# Altium PCB openmv4_PCB.PcbDoc
Units mm, origin at the board's own origin, x right, y up, seen from the top; angles counter-clockwise.
Board outline 35.56 x 44.45 mm, 2 copper layers (Top Layer, Bottom Layer); 61 components, 81 nets, 309 pads, 192 vias.
Unrouted connection lines stored in the file: 39.
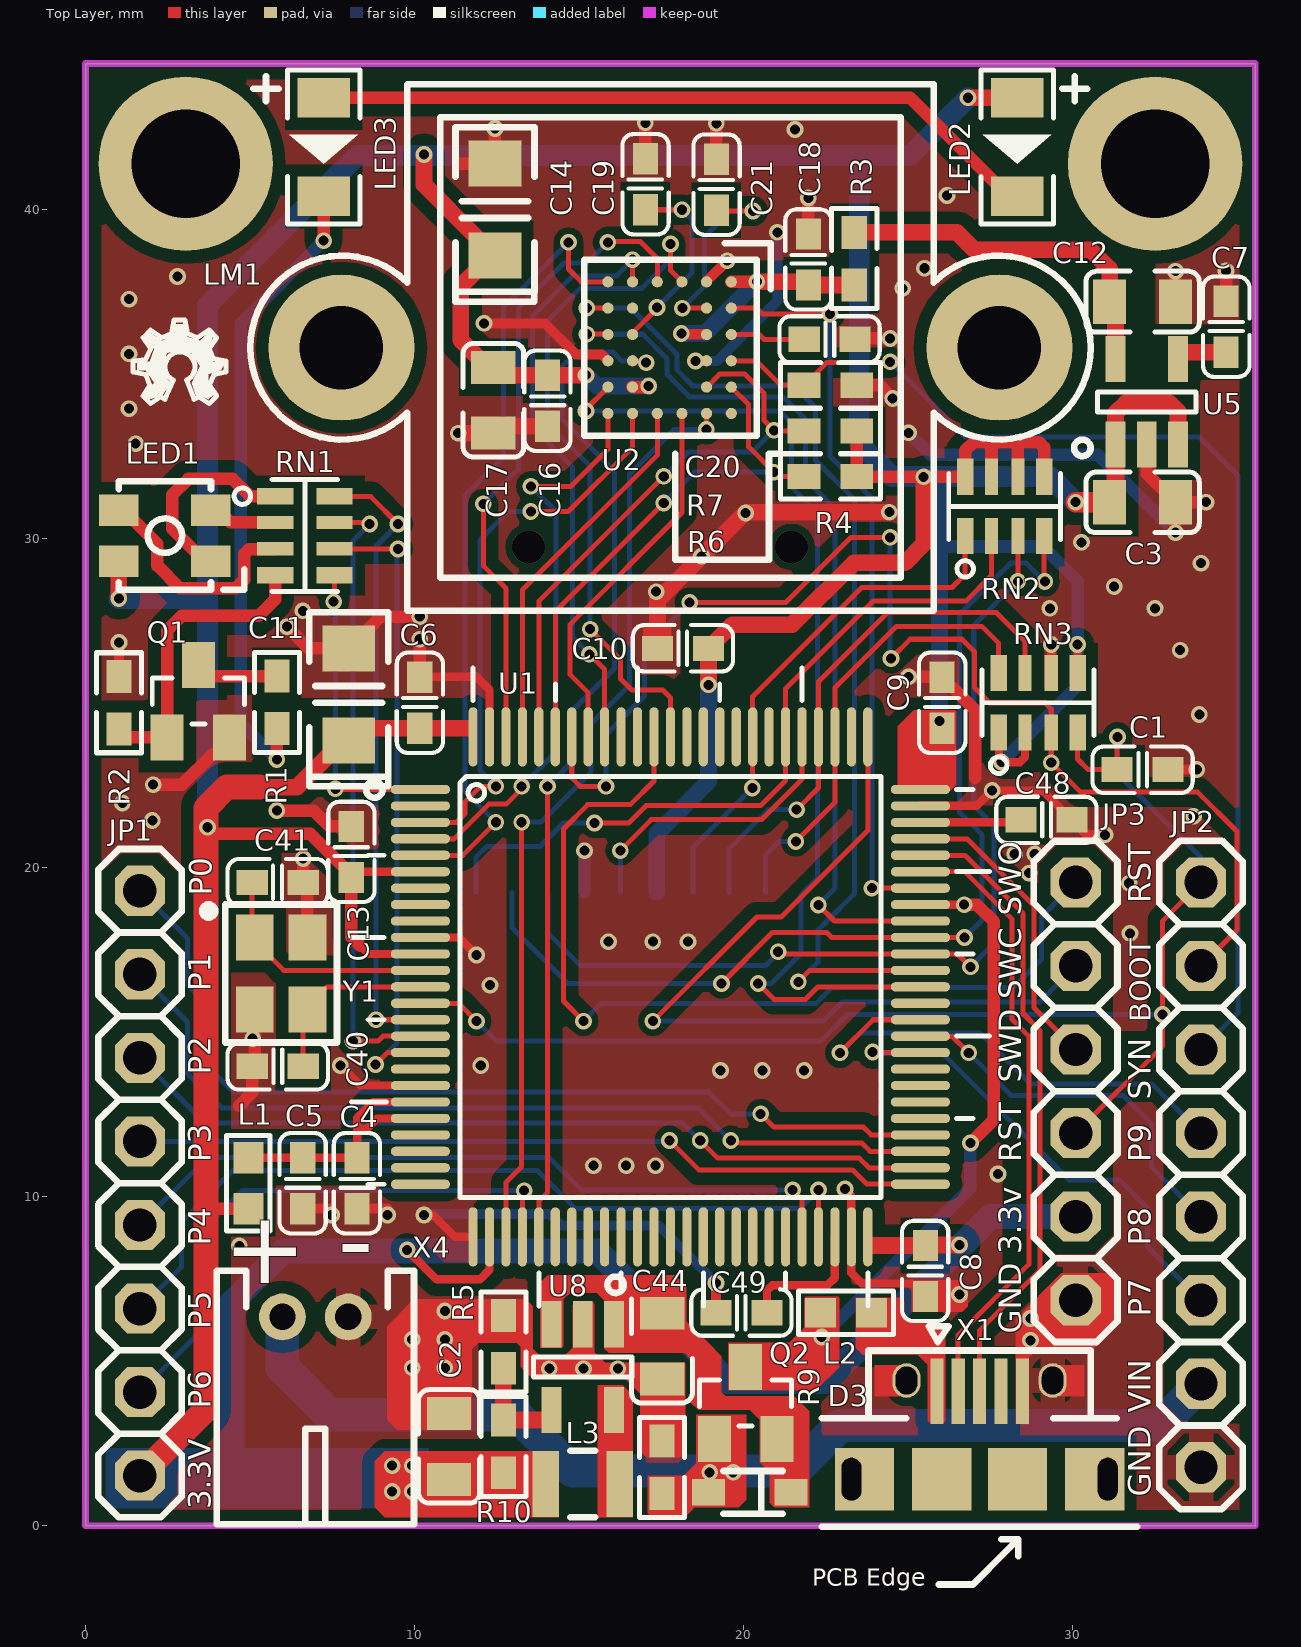
[diagram p0: Top Layer view]
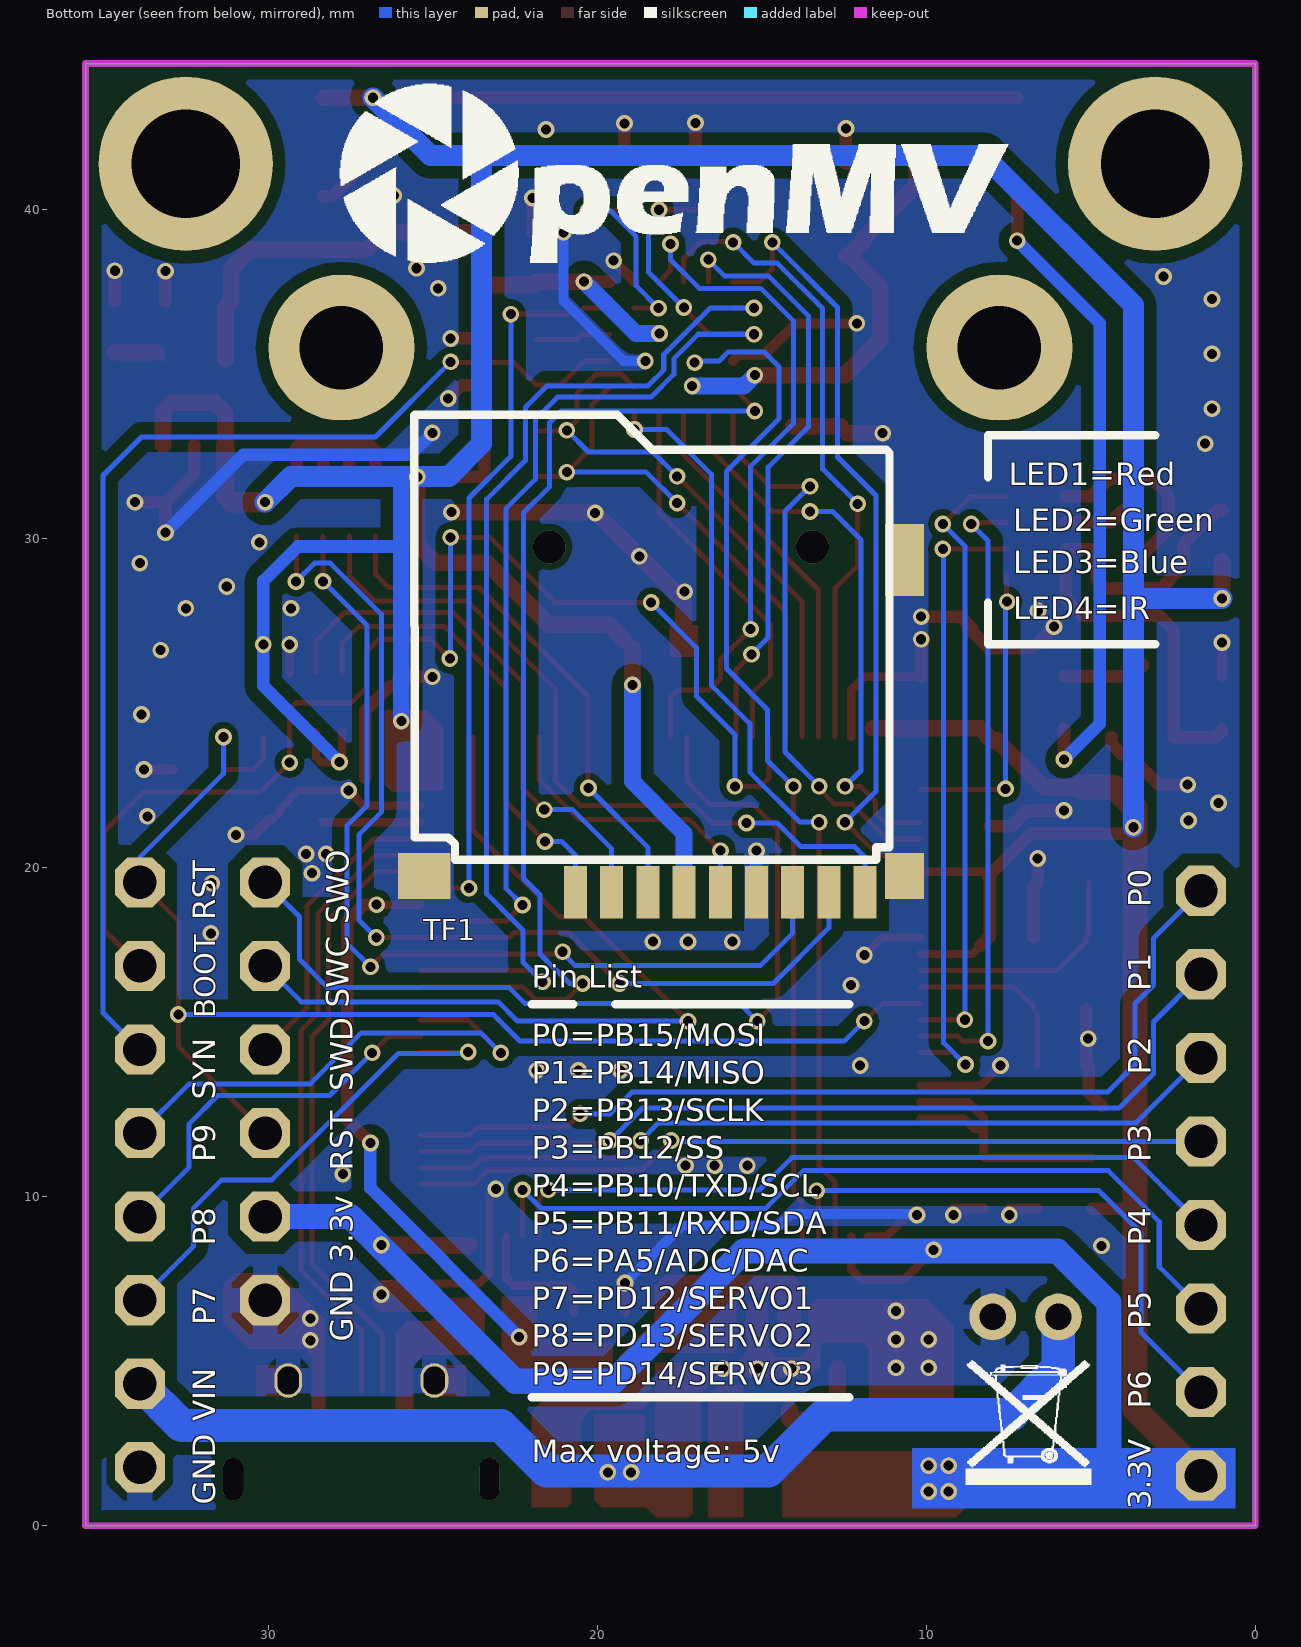
[diagram p1: Bottom Layer view, seen from below]
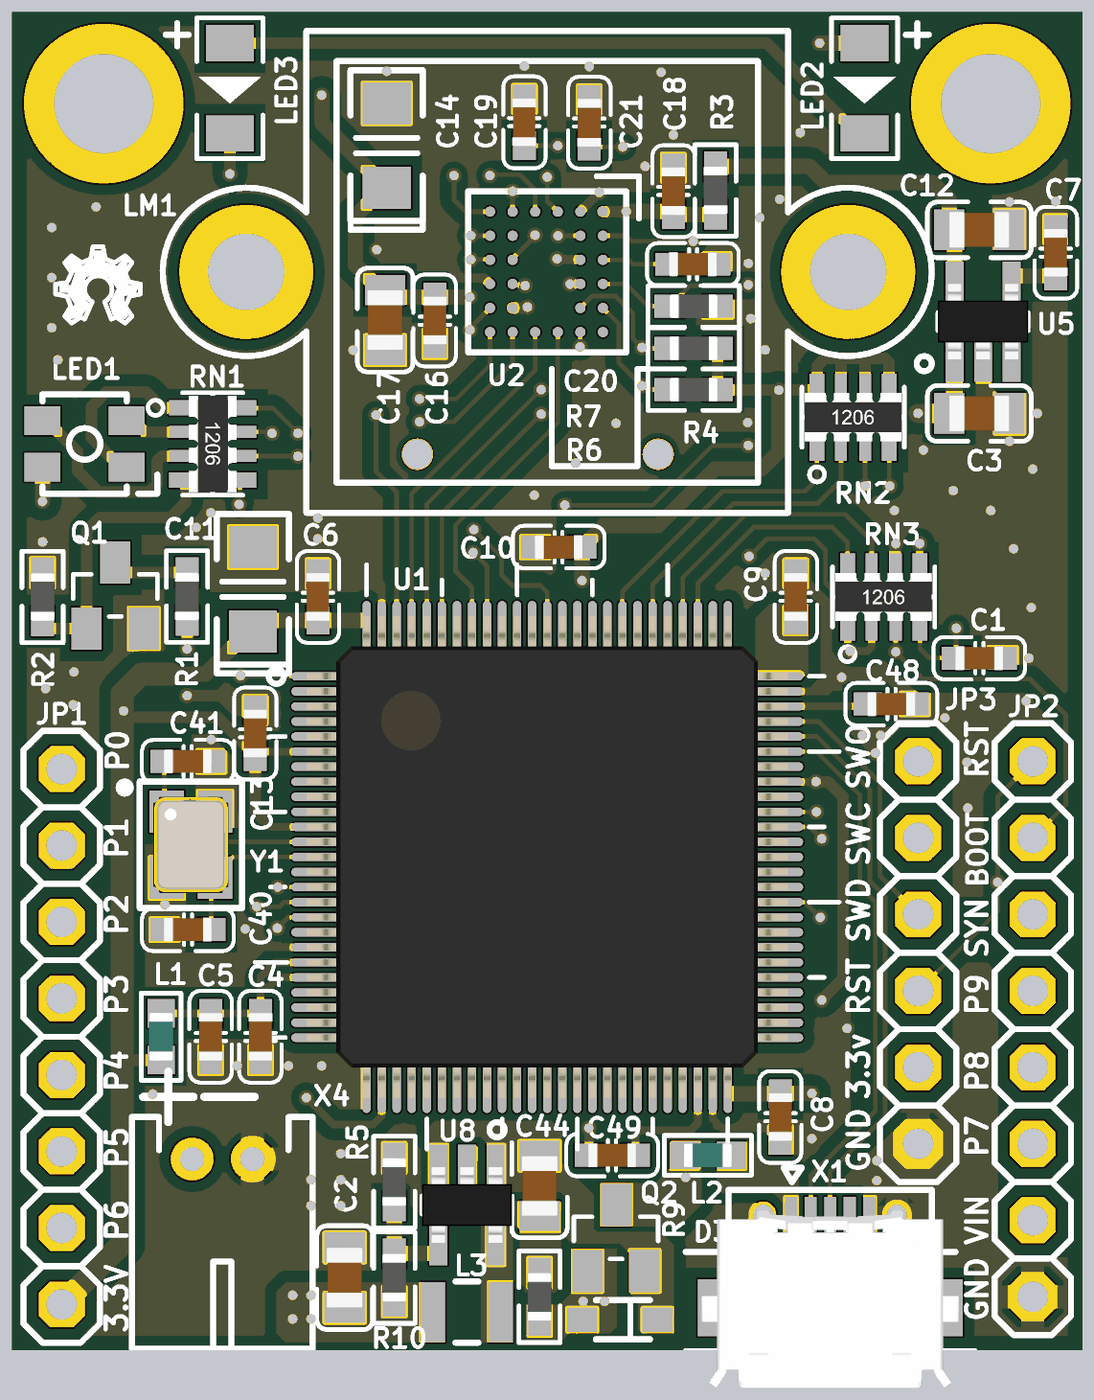
[diagram p2: 3D render of the assembled board from above, using the file's embedded part models]

## Layer stack, top to bottom
Top Solder: solder mask 0.0102, Solder Resist, Dk 3.5
Top Layer: signal copper 0.0356
Dielectric1: dielectric 0.32, FR-4, Dk 4.8
Bottom Layer: signal copper 0.0356
Bottom Solder: solder mask 0.0102, Solder Resist, Dk 3.5

## Board outline
0,0 35.56,0 35.56,44.45 0,44.45

## Design rules (kind name [scope] priority, off if disabled: settings)
Clearance Clearance_2 [IsVia] p1: gap=0.203 ignorepadtopadclearanceinfootprint=FALSE except(0: Arc-Hole Track-Hole SMDPad-Hole THPad-Hole Via-Hole Fill-Hole Poly-Hole Region-Hole Text-Hole)
Clearance Clearance_1 [InPoly] p2: gap=0.381 ignorepadtopadclearanceinfootprint=FALSE
Clearance [All] p3: gap=0.152 ignorepadtopadclearanceinfootprint=FALSE except(0: Arc-Hole Track-Hole SMDPad-Hole THPad-Hole Via-Hole Fill-Hole Poly-Hole Region-Hole Text-Hole)
PolygonConnect PolygonConnect_1 [IsVia or IsSMTPin] p1: connectstyle=Direct reliefconductorwidth=0.254 reliefentries=4 polygonreliefangle="90 Angle" airgapwidth=0.254
PolygonConnect [All] p2: connectstyle=Relief reliefconductorwidth=0.762 reliefentries=4 polygonreliefangle="90 Angle" airgapwidth=0.254
RoutingVias [All] p1: holewidth=0.305 width=0.508 viastyle="Through Hole" minholewidth=0.305 minwidth=0.508 maxholewidth=0.305 maxwidth=0.508
SolderMaskExpansion [All] p1: expansion=0.064 istentingtop=FALSE
Width Width_1 [InNetClass('POWER')] p1: maxlimit=1.524 minlimit=0.254 preferedwidth=0.381
Width [All] p2: maxlimit=0.508 minlimit=0.152 preferedwidth=0.152
30 further rules are at their usual default settings.

## Classes and differential pairs
net class POWER: AVDD GND VBUS VCC VDDA VIN

## Components (designator, comment, footprint, x,y, rotation, side; value= is the part's Value field where it differs from the comment)
C1 "1uF" C0603 32.131,22.987 r0 top
C2 "22uF" C0805 11.049,2.413 r270 top
C3 "10uF" C0805 32.131,31.115 r180 top
C4 "1uF" C0603 8.255,10.414 r270 top
C5 "0.1uF" C0603 6.604,10.414 r270 top
C6 "0.1uF" C0603 10.16,25.019 r90 top
C7 "0.1uF" C0603 34.671,36.449 r90 top
C8 "0.1uF" C0603 25.527,7.747 r270 top
C9 "0.1uF" C0603 26.035,25.019 r90 top
C10 "0.1uF" C0603 18.161,26.67 r180 top
C11 "47uF" EIA3216 8.001,25.273 r270 top
C12 "10uF" C0805 32.131,37.211 r180 top
C13 "0.1uF" C0603 8.077,20.485 r90 top
C14 "47uF" EIA3216 12.446,40.008 r270 top
C16 "0.1uF" C0603 14.046,34.201 r270 top
C17 "22uF" C0805 12.395,34.214 r270 top
C18 "4.7uF" C0603 21.971,38.494 r90 top
C19 "0.1uF" C0603 17.018,40.78 r90 top
C20 "0.1uF" C0603 22.619,36.068 r0 top
C21 "0.1uF" C0603 19.177,40.767 r90 top
C40 "12pF" C0603 5.842,13.97 r0 top
C41 "12pF" C0603 5.842,19.558 r180 top
C44 "22uF" C0805 17.526,5.461 r90 top
C48 "2.2uF" C0603 29.21,21.463 r0 top
C49 "2.2uF" C0603 19.939,6.477 r180 top
D3 "SDM2U20SD3-7" SOD323 20.193,1.016 r180 top
JP1 "PINHD-1X8" 1X08 1.651,10.414 r270 top
JP2 "PINHD-1X8" 1X08 33.909,10.668 r270 top
JP3 "PINHD-1X6" 1X06 30.099,13.208 r270 top
L1 "MPZ1608S181ATAH0" l0603 4.953,10.414 r270 top
L2 "MPZ1608S181ATAH0" l0603 23.114,6.477 r180 top
L3 "4.7uH/1.4A" 1007 15.113,1.27 r270 top
LED1 "LED-TRICOLOR" LED-TRICOLOR-SMD-MF 2.413,30.099 r0 top
LED2 "VSMY12850" LED-1206 28.321,41.91 r270 top
LED3 "VSMY12850" LED-1206 7.239,41.91 r270 top
LM1 "LENSMOUNT20MM" LENSMOUNT-20MM 17.78,35.814 r0 top locked
Q1 "BSS138" SOT23-3 3.429,25.069 r0 top
Q2 "Si2301BDS" SOT23-3 20.066,3.733 r0 top
R1 "10R" R0603 5.817,25.032 r270 top
R2 "10K" R0603 1.016,25.019 r270 top
R3 "4.7K" R0603 23.368,38.519 r90 top
R4 "4.7K" R0603 22.644,31.902 r180 top
R5 "100K" R0603 12.7,5.588 r270 top
R6 "4.7K" R0603 22.644,33.274 r180 top
R7 "10k" R0603 22.644,34.671 r180 top
R9 "10K" R0603 17.526,1.778 r270 top
R10 "453K" R0603 12.7,2.413 r270 top
RN1 "220R" EXBV8V 6.667,30.099 r270 top
RN2 "10K" EXBV8V 27.94,30.988 r0 top
RN3 "10K" EXBV8V 28.956,25.019 r0 top
TF1 "TF_Card" TF-2 18.415,24.308 r90 bottom locked
U1 "STM32H743VIT6" LQFP100 17.78,16.383 r0 top locked
U2 "OV7725" CSP2-28 17.78,35.814 r270 top locked
U5 "TPS731XX" SOT23-5 32.258,34.163 r0 top
U8 "PAM2305AABADJ" SOT23-5 15.113,4.826 r180 top
X1 "MF-CON-MICROUSB-RIGHT" MICROUSB-RIGHT 27.178,1.417 r0 top
X4 "S2B-PH-K-S(LF)(SN)" JST-PH-2-THM-RA 6.985,6.35 r180 top
Y1 "7S-12.000MAHE-T" XTAL-SMD-3225_4P 5.944,16.789 r270 top
? "NC" WEEE 8.788,1.257 r180 bottom
? "NC" OMV-LOGO-BIG 27.813,38.405 r180 bottom
? "NC" OSHW_FILLX100_NOTEXT 1.448,34.112 r0 top

## Footprints (in the part's own frame and the unit in brackets; to place one, negate y for a bottom-side part, rotate by r counter-clockwise, add the part's x,y. Pads: shape width x height; smd on the part's side, far side on the other; paste and mask are expansions set on the pad)
1X06 [mil] "1X06"
  oct 60x60 hole 40: 1(-250,0) 2(-150,0) 3(-50,0) 4(50,0) 5(150,0) 6(250,0)
  silkscreen extent -300,-50 300,50
1X08 [mil] "1X08"
  oct 60x60 hole 40: 1(-350,0) 2(-250,0) 3(-150,0) 4(-50,0) 5(50,0) 6(150,0) 7(250,0) 8(350,0)
  silkscreen extent -400,-50 400,50
1007 [mm] "1007"
  rect 2x0.8 smd: 1(0,1.127) 2(0,-1.127)
  silkscreen extent -1.02,-0.38 1.02,0.38
C0603 [mm] "Chip Capacitor, 2-Leads, Body 1.6x0.8mm, IPC Medium Density"
  rect 0.95x0.762 smd: 1(-0.775,0) 2(0.775,0)
  silkscreen extent -1.53,-0.71 1.53,0.7, body extent -0.8,-0.4 0.8,0.4, height 0.6
C0805 [mm] "Chip Capacitor, 2-Leads, Body 2.0x1.2mm, IPC Medium Density"
  rect 1x1.35 smd: 1(-1,0) 2(1,0)
  silkscreen extent -1.73,-0.92 1.73,0.92, body extent -1,-0.6 1,0.6, height 0.95
CSP2-28 [mm] "CSP2-28"
  rrect100% 0.34x0.34 smd: A1(-2,1.85) A2(-1.2,1.85) A3(-0.4,1.85) A4(0.4,1.85) A5(1.2,1.85) A6(2,1.85) B1(-2,1.1) B2(-1.2,1.1) B3(-0.4,1.1) B4(0.4,1.1) B5(1.2,1.1) B6(2,1.1) C1(-2,0.35) C6(2,0.35) D1(-2,-0.4) D6(2,-0.4) E1(-2,-1.15) E2(-1.2,-1.15) E3(-0.4,-1.15) E4(0.4,-1.15) E5(1.2,-1.15) E6(2,-1.15) F1(-2,-1.9) F2(-1.2,-1.9) F3(-0.4,-1.9) F4(0.4,-1.9) F5(1.2,-1.9) F6(2,-1.9)
  silkscreen extent -3.18,-2.63 2.68,3.05
EIA3216 [mm] "EIA3216"
  rect 1.4x1.6 smd: A(1.4,0) C(-1.4,0)
  silkscreen extent -2.5,-1.2 2.79,1.2
EXBV8V [mm]
  rect 0.5x1.1 smd: 1(-1.2,-0.9) 4(1.2,-0.9) 5(1.2,0.9) 8(-1.2,0.9)
  rect 0.4x1.1 smd: 2(-0.4,-0.9) 3(0.4,-0.9) 6(0.4,0.9) 7(-0.4,0.9)
  silkscreen extent -1.7,-2.15 1.7,1, body extent -1.6,-0.8 1.6,0.8, height 0.5
JST-PH-2-THM-RA [mil] "JST-PH-2-THM-RA"
  round 56 / inner round 60 / far side round 56 hole 31.5: 1(39.37,0) 2(-39.37,0)
  silkscreen extent -118,-55 118,248
l0603 [mm] "Chip Inductor, 2-Leads, Body 1.6x0.8mm, IPC Medium Density"
  rect 0.95x0.9 smd: 1(-0.775,0) 2(0.775,0)
  silkscreen extent -1.45,-0.66 1.45,0.66, body extent -0.8,-0.4 0.8,0.4, height 0.95
LED-1206 [mm]
  rect 1.2x1.6 smd: 1(-1.5,0) 2(1.5,0)
  silkscreen extent -2.34,-1.1 2.34,1.1
LED-TRICOLOR-SMD-MF [mm] "LED-TRICOLOR-SMD-MF"
  rect 1.2x0.95 smd: 1(1.4,-0.775) 2(-1.4,-0.775) 3(-1.4,0.775) 4(1.4,0.775)
  silkscreen extent -1.4,-1.65 2.41,1.65
LENSMOUNT-20MM [mm] "LENSMOUNT-20MM"
  round 4.445 / inner round 1.524 / far side round 4.445 hole 2.54: 1(-10,0) 2(10,0)
  silkscreen extent -12.77,-8 12.77,8
LQFP100 [mm]
  oval 1.8x0.28 smd: 1(-7.6,6) 2(-7.6,5.5) 3(-7.6,5) 4(-7.6,4.5) 5(-7.6,4) 6(-7.6,3.5) 7(-7.6,3) 8(-7.6,2.5) 9(-7.6,2) 10(-7.6,1.5) 11(-7.6,1) 12(-7.6,0.5) 13(-7.6,0) 14(-7.6,-0.5) 15(-7.6,-1) 16(-7.6,-1.5) 17(-7.6,-2) 18(-7.6,-2.5) 19(-7.6,-3) 20(-7.6,-3.5) 21(-7.6,-4) 22(-7.6,-4.5) 23(-7.6,-5) 24(-7.6,-5.5) 25(-7.6,-6) 51(7.6,-6) 52(7.6,-5.5) 53(7.6,-5) 54(7.6,-4.5) 55(7.6,-4) 56(7.6,-3.5) 57(7.6,-3) 58(7.6,-2.5) 59(7.6,-2) 60(7.6,-1.5) 61(7.6,-1) 62(7.6,-0.5) 63(7.6,0) 64(7.6,0.5) 65(7.6,1) 66(7.6,1.5) 67(7.6,2) 68(7.6,2.5) 69(7.6,3) 70(7.6,3.5) 71(7.6,4) 72(7.6,4.5) 73(7.6,5) 74(7.6,5.5) 75(7.6,6)
  oval 0.28x1.8 smd: 26(-6,-7.6) 27(-5.5,-7.6) 28(-5,-7.6) 29(-4.5,-7.6) 30(-4,-7.6) 31(-3.5,-7.6) 32(-3,-7.6) 33(-2.5,-7.6) 34(-2,-7.6) 35(-1.5,-7.6) 36(-1,-7.6) 37(-0.5,-7.6) 38(0,-7.6) 39(0.5,-7.6) 40(1,-7.6) 41(1.5,-7.6) 42(2,-7.6) 43(2.5,-7.6) 44(3,-7.6) 45(3.5,-7.6) 46(4,-7.6) 47(4.5,-7.6) 48(5,-7.6) 49(5.5,-7.6) 50(6,-7.6) 76(6,7.6) 77(5.5,7.6) 78(5,7.6) 79(4.5,7.6) 80(4,7.6) 81(3.5,7.6) 82(3,7.6) 83(2.5,7.6) 84(2,7.6) 85(1.5,7.6) 86(1,7.6) 87(0.5,7.6) 88(0,7.6) 89(-0.5,7.6) 90(-1,7.6) 91(-1.5,7.6) 92(-2,7.6) 93(-2.5,7.6) 94(-3,7.6) 95(-3.5,7.6) 96(-4,7.6) 97(-4.5,7.6) 98(-5,7.6) 99(-5.5,7.6) 100(-6,7.6)
  silkscreen extent -9.7,-9.7 9.7,9.7, body extent -8,-8 8,8, height 1.72
MICROUSB-RIGHT [mm]
  oval 0.6x1.3 hole 0.6 slot 1.3 at 90 deg: 0(-3.895,0) 0(3.895,0)
  rect 1.8x1.9 smd: 0(-3.5,0) 0(-1.15,0) 0(1.15,0) 0(3.5,0)
  oval 0.85x1.05 hole 0.85 slot 0.65 at 0 deg: 0(-2.22,3) 0(2.22,3)
  rect 0.4x2 smd: 1(-1.3,2.675) 2(-0.65,2.675) 3(0,2.675) 4(0.65,2.675) 5(1.3,2.675)
  Top Layer region: -2.23,3.472 -3.193,3.472 -3.193,2.51 -2.23,2.51
  Top Layer region: 2.23,2.51 3.193,2.51 3.193,3.472 2.23,3.472
  silkscreen extent -4.8,-3.2 4.8,4.65, body extent -4.32,-2.67 4.32,3.23, height 2.85
OMV-LOGO-BIG [mm] "OMV-LOGO-BIG"
  silkscreen extent -0.01,-0.01 20.31,5.42
OSHW_FILLX100_NOTEXT [mm] "OSHW_FILLX100_NOTEXT"
  silkscreen extent 0,0 2.82,2.54
R0603 [mm] "Chip Resistor, 2-Leads, Body 1.6x0.8mm, IPC Medium Density"
  rect 1x0.762 smd: 1(-0.8,0) 2(0.8,0)
  silkscreen extent -1.52,-0.69 1.52,0.69, body extent -0.8,-0.4 0.8,0.4, height 0.38
SOD323 [mm]
  rect 1x0.8 smd: 1(-1.25,0) 2(1.25,0)
  silkscreen extent -1,-0.65 0.8,0.65
SOT23-3 [mm]
  rect 1x1.4 smd: 1(-0.95,-1.1) 2(0.95,-1.1) 3(0,1.1)
  silkscreen extent -1.4,-0.7 1.4,0.7
SOT23-5 [mm]
  rect 0.6x1.4 smd: 1(-0.95,-1.3) 2(0,-1.3) 3(0.95,-1.3) 4(0.95,1.3) 5(-0.95,1.3)
  silkscreen extent -2.2,-1.65 1.5,0.3, body extent -1.5,-1.25 1.5,1.25, height 1.05
TF-2 [mm]
  rect 1.4x1.6 smd: 0(-4.55,6.85)
  rect 1.6x0.7 smd: 1(-5.05,2.25) 2(-5.05,1.15) 3(-5.05,0.05) 4(-5.05,-1.05) 5(-5.05,-2.15) 6(-5.05,-3.25) 7(-5.05,-4.35) 8(-5.05,-5.45) 9(-5.05,-6.55)
  rect 1.4x1.2 smd: 10(-4.55,-7.75)
  rect 2.2x1.2 smd: 11(5.05,-7.75)
  silkscreen extent -4.06,-7.29 9.47,7.15
WEEE [mm] "WEEE"
  silkscreen extent -0.01,-0.01 3.8,3.77
XTAL-SMD-3225_4P [mm]
  rect 1.4x1.15 smd: 1(-1.1,-0.8) 2(1.1,-0.8) 3(1.1,0.8) 4(-1.1,0.8)
  silkscreen extent -2.1,-2.35 2.1,1.7, body extent -1.6,-1.25 1.6,1.25, height 0.61

## Part data
C1 C4 C5 C6 C7 C8 C9 C10 C13 C16 C18 C19 C20 C21 C40 C41 C48 C49: library part CAP0603-CAP, "CapacitorStandard 0603 ceramic capacitor, and 0.1\" leaded capacitor."
C2 C3 C12 C17 C44: library part CAP0805, "CapacitorStandard 0603 ceramic capacitor, and 0.1\" leaded capacitor."
C11 C14: library part CAP_POL1206, "Capacitor PolarizedThese are standard SMD and PTH capacitors. Normally 10uF, 47uF, and 100uF in electrolytic and tantalum varieties. Always verify the external diameter of the through hole cap, it varies with capacity, voltage, and manufacturer. The EIA d"
D3: library part DIODESOD, "DiodeThese are standard reverse protection diodes and small signal diodes. SMA package can handle up to about 1A. SOD-323 can handle about 200mA. What the SOD-323 package when ordering, there are some mfgs out there that are 5-pin packages."
JP1 JP2 JP3: "PIN HEADER"
L1 L2: library part INDUCTOR0603, "InductorsBasic Inductor/Choke - 0603 and 1206. Footprints are not proven and vary greatly between part numbers."
L3: library part INDUCTOR1007, "InductorsBasic Inductor/Choke - 0603 and 1206. Footprints are not proven and vary greatly between part numbers."
LED1: "Tri-Color LED SMDProven layout and schematic for triple color LED in SMD package - common anode. Spark Fun Electronics SKU : COM-07844"
LED2 LED3: library part LED1206, "LEDsStandard schematic elements and footprints for 5mm, 3mm, 1206, and 0603 sized LEDs. 5mm - Spark Fun Electronics SKU : COM-00529 (and others)"
Q1: library part MOSFET-NCHANNELSMD
Q2: library part MOSFET-PCHANNELSMD
R1 R2 R3 R4 R5 R6 R7 R9 R10: library part RESISTOR0603-RES, "ResistorBasic schematic elements and footprints for 0603, 1206, and PTH resistors."
RN1 RN2 RN3: library part 4R-NEXBV8V, "Array Chip Resistor   Source: RS Component / Phycomp"
TF1: library part TF_CADE
U1: library part STM32F746LQFP100
U8: library part PAM2305AAB330
X1: library part USB_MICRO_RIGHT, "Library:  MF_Connectors Description: 5 Pin USB Connectors. SLD is the shield connection. Usually tied to ground through a small ferrite bead."
X4: library part JST_2PIN-THM-RA, "JST 2-Pin Connectors of various flavors SMT-RA (S2B-PH-SM4) 4UConnector #17311  SMT  (B2B-PH-SM4)  THM-RA (S2B-PH)  THM  (B2B-PH)"
Y1: library part CRYSTAL2.5X2.0, "CrystalsVarious standard crystals. Proven footprints. Spark Fun Electronics SKU : COM-00534"

## Free pads (board coordinates)
  round 5.3 hole 3.3: 0(3.048,41.402) 0(32.512,41.402)

## Via types
v1: diameter 0.508, hole 0.305, Top Layer to Bottom Layer, tented both sides, 190 vias
v2: diameter 1, hole 1, Top Layer to Bottom Layer, 2 vias

## Nets (pads, with @x,y where several pads share a name; then routed paths per layer and width w, separated by ;. In a path a pad name is that pad's centre, name@x,y a point inside that pad or via, vN(x,y) a via of type N, cw(c..) or ccw(c..) an arc to the next point about the centre after c; other vN are vias at no path point)
AVDD: C18.1 R3.1 U2.A1 U2.B3 | length 7.5
  Top Layer w0.254: v1@20.352,37.814 20.375,37.791 v1@20.396,37.77 ; C18.1@21.869,37.821 C18.1
  Top Layer w0.305: v1@18.136,36.246 18.161,36.221 18.873,36.221 U2.B3
  Top Layer w0.381: U2.A1 v1@20.352,37.814
  Top Layer w0.508: v1(20.405,37.821) C18.1@21.869,37.821 ; C18.1 R3.1
  Bottom Layer w0.508: v1@18.136,36.246 18.83,36.246 v1(20.405,37.821)
  other v1: 18.11,36.246
BOOT0: JP2.2 RN3.3 U1.94 | length 38.9
  Top Layer w0.152: U1.94 14.78,22.736 15.037,22.479 v1(15.824,22.479) ; v1(18.364,28.067) 21.285,28.067 23.266,30.048 v1(24.46,30.048) ; v1(24.486,26.365) 25.07,26.949 26.645,26.949 27.026,26.568 27.026,25.476 27.483,25.019 29.159,25.019 29.356,24.822 RN3.3 v1(29.356,23.197) 30.251,22.301 33.807,22.301 35.001,21.107 35.001,18.11 JP2.2
  Bottom Layer w0.152: v1(15.824,22.479) 15.824,24.054 16.993,25.222 16.993,26.695 v1(18.364,28.067) ; v1@24.46,26.365 v1(24.46,30.048)
DAC: JP1.7 U1.29 | length 17.4
  Top Layer w0.152: U1.29 13.28,10.08 v1@13.335,10.135
  Bottom Layer w0.152: JP1.7 3.48,5.893 3.48,8.915 4.75,10.185 v1(13.335,10.185)
DCMI_CLK: U1.67 U2.F3 | length 27.3
  Top Layer w0.152: v1@15.256,36.23 15.864,36.23 U2.F3 ; v1(22.276,18.872) 22.765,18.383 U1.67
  Bottom Layer w0.152: v1(15.24,36.22) 16.938,36.22 17.678,35.48 17.678,35.002 18.365,34.315 21.209,34.315 21.885,33.639 21.885,31.812 22.784,30.913 22.784,19.38 v1(22.276,18.872)
DCMI_D0: U1.63 U2.F5 | length 31.1
  Top Layer w0.152: v1@15.155,33.889 U2.F5 ; v1(20.447,16.485) 20.93,16.002 21.887,16.002 22.268,16.383 U1.63
  Bottom Layer w0.152: v1@15.228,33.875 v1(15.215,33.889) 21.094,33.889 21.463,33.52 21.463,31.572 22.244,30.791 22.244,19.679 21.742,19.177 21.742,17.381 21.278,16.916 21.275,16.916 20.843,16.485 v1(20.447,16.485)
DCMI_D1: U1.64 U2.F2 | length 31.6
  Top Layer w0.152: v1@15.31,37.014 U2.F2 ; v1(21.666,16.535) 22.014,16.883 U1.64
  Bottom Layer w0.152: v1(15.24,37.02) 16.569,37.02 17.983,35.607 17.983,35.128 18.466,34.646 21.539,34.646 22.19,33.995 22.19,32.385 23.368,31.207 23.368,19.21 22.557,18.399 22.557,18.397 22.26,18.1 22.26,17.129 v1(21.666,16.535)
DCMI_D2: U1.97 U2.D6 | length 11.5
  Top Layer w0.152: U1.97 13.28,28.444 17.38,32.544 U2.D6
DCMI_D3: U1.98 U2.D1 | length 19.7
  Top Layer w0.152: v1(12.09,31.064) 12.09,29.185 12.78,28.495 U1.98 ; v1(15.875,39.014) 15.901,39.041 16.865,39.041 17.38,38.525 U2.D1
  Bottom Layer w0.152: v1(12.09,31.064) 13.157,32.131 13.157,37.008 14.529,38.379 15.24,38.379 v1(15.875,39.014)
DCMI_D4: U1.3 U2.E6 | length 17.5
  Top Layer w0.152: U1.3 11.274,21.383 11.542,21.652 11.542,22.007 12.014,22.479 v1(12.471,22.479) ; v1(13.538,30.836) 14.681,30.836 16.63,32.784 U2.E6
  Bottom Layer w0.152: v1(12.471,22.479) 11.989,22.962 11.989,29.972 12.852,30.836 v1(13.538,30.836)
DCMI_D5: U1.92 U2.E1 | length 18.1
  Top Layer w0.152: v1(15.316,26.492) 15.78,26.028 U1.92 ; U2.E1 v1(16.63,38.488)
  Bottom Layer w0.152: v1(15.316,26.492) 14.808,27 14.808,32.182 13.589,33.401 13.589,36.779 14.808,37.998 16.14,37.998 v1(16.63,38.488)
DCMI_D6: U1.4 U2.F6 | length 17.6
  Top Layer w0.152: U1.4 11.206,20.883 12.268,21.946 12.802,21.946 13.259,22.403 v1(13.259,22.479) ; v1(13.538,31.598) 14.757,31.598 15.88,32.72 U2.F6
  Bottom Layer w0.152: v1(13.259,22.479) 14.3,23.52 14.3,30.836 v1(13.538,31.598)
DCMI_D7: U1.5 U2.F1 | length 24.2
  Top Layer w0.152: U1.5 11.468,20.383 v1(12.471,21.387) ; v1(14.681,39.014) 14.681,38.202 15.069,37.814 U2.F1
  Bottom Layer w0.152: v1(12.471,21.387) 11.532,22.327 11.532,31.318 12.7,32.487 12.7,37.033 v1(14.681,39.014)
DCMI_FSIN: JP2.3 R7.2 U2.A4 | length 35.4
  Top Layer w0.152: U2.A4 20.39,35.414 21.133,34.671 R7.2 22.53,35.357 24.46,35.357 v1(24.46,35.382)
  Bottom Layer w0.152: v1(24.46,35.382) 26.746,33.096 33.858,33.096 35.027,31.928 35.027,15.596 JP2.3
DCMI_HSYNC: U1.28 U2.B6 | length 28.5
  Top Layer w0.152: U1.28 12.78,10.443 13.259,10.922 v1(13.259,21.387) ; v1@18.88,33.325 U2.B6
  Bottom Layer w0.152: v1(13.259,21.387) 13.843,21.387 15.367,22.911 15.367,24.384 16.535,25.552 16.535,31.966 17.894,33.325 v1(18.872,33.325)
DCMI_PCLK: U1.30 U2.E4 | length 31.4
  Top Layer w0.152: U1.30 13.78,9.868 14.046,10.135 14.046,22.428 v1@14.122,22.504 ; U2.E4 16.658,35.385 17.015,35.385 v1(17.043,35.357)
  Bottom Layer w0.152: v1(14.046,22.479) 14.834,23.266 14.834,24.816 16.078,26.06 16.078,32.055 14.478,33.655 14.478,35.23 14.935,35.687 16.021,35.687 16.3,35.408 16.993,35.408 v1(17.043,35.357)
DCMI_PWDN: U1.88 U2.C1 | length 21
  Top Layer w0.152: v1(15.342,27.254) 16.256,26.34 16.256,25.756 16.612,25.4 17.551,25.4 17.78,25.171 U1.88 ; v1(17.78,38.964) 17.78,38.164 U2.C1
  Bottom Layer w0.152: v1(15.342,27.254) 15.342,32.207 14.046,33.503 14.046,36.627 15.037,37.617 16.908,37.617 17.78,38.489 v1(17.78,38.964)
DCMI_RST: U1.69 U2.A2 | length 22.5
  Top Layer w0.152: U2.A2 20.402,37.014 20.586,36.83 v1(22.631,36.83) ; v1(23.901,19.383) U1.69
  Bottom Layer w0.152: v1(22.631,36.83) 22.631,32.512 23.901,31.242 v1(23.901,19.383)
DCMI_VSYNC: U1.93 U2.C6 | length 11.5
  Top Layer w0.152: U1.93 15.28,25.324 14.732,25.872 14.732,27.403 18.13,30.801 U2.C6
EXPST: U1.55
FREX: U1.56
FS_DM: U1.70 X1.2 | length 18.8
  Top Layer w0.152: U1.70 26.726,19.883 28.169,18.44 28.169,15.392 28.677,14.884 28.677,7.95 26.528,5.802 X1.2
FS_DP: U1.71 X1.3 | length 19.3
  Top Layer w0.152: U1.71 26.734,20.383 28.499,18.618 28.499,15.57 29.007,15.062 29.007,7.772 27.178,5.944 X1.3
GND: C1.2 C2.1 C3.1 C4.2 C5.2 C6.2 C7.2 C8.2 C9.2 C10.2 C11.C C12.1 C13.2 C14.C C16.2 C17.2 C18.2 C19.2 C20.2 C21.2 C40.1 C41.1 C44.1 C48.2 C49.2 JP2.8 JP3.6 Q1.2 R2.1 R5.1 R7.1 R9.1 RN3.6 TF1.0 TF1.6 TF1.10 TF1.11 U1.10 U1.19 U1.26 U1.49 U1.74 U1.99 U2.B1 U2.B4 U2.F4 U5.2 U8.2 X1.0@24.958,4.417 X1.0@29.398,4.417 X1.5 X4.2 Y1.2 Y1.4 | length 109
  Top Layer w0.254: v1(7.747,13.995) 8.359,13.383 U1.19 ; C6.2 10.172,25.806 11.887,25.806 12.28,25.414 U1.99 ; U1.10 11.352,17.883 v1(11.887,17.348) ; v1(10.287,9.449) 10.566,9.449 11.232,8.783 U1.26 ; v1(23.089,10.236) 23.089,10.211 23.28,10.019 U1.49 23.28,7.683 23.597,7.366 25.133,7.366 25.179,7.32 25.273,7.32 25.527,7.066 C8.2 ; U1.74 27.09,21.883 v1(27.559,22.352) 29.096,22.352 29.637,21.811 29.637,21.717 29.891,21.463 C48.2 ; RN3.6 v1(29.356,26.791)
  Top Layer w0.305: R2.1 v1(1.016,26.848) ; C5.2 v1@7.48,9.639 ; C4.2 v1@9.182,9.639 ; v1(12.116,36.551) 13.97,36.551 14.91,35.611 15.683,35.611 U2.F4 ; C17.2 C17.2@12.607,33.426 ; v1@18.593,35.408 18.596,35.411 18.877,35.411 U2.B4 ; U2.B1 18.88,37.828 v1(19.507,38.456) ; C49.2 v1(19.164,7.379) ; C48.2 30.442,21.006 v1(30.988,21.006) ; C1.2 v1(33.782,22.987)
  Top Layer w0.381: v1(2.057,22.53) 2.94,22.53 3.869,23.46 4.069,23.46 4.379,23.769 Q1.2 ; 4.674,12.776 5.067,13.17 C40.1 5.144,14.047 Y1.2 ; v1(5.817,21.742) 6.935,21.742 7.417,21.26 C13.2 ; v1(6.121,27.33) 6.779,26.673 C11.C 8.101,26.673 8.61,27.183 8.61,27.283 8.963,27.635 v1(10.16,27.635) ; v1(6.617,20.282) C41.1 6.744,19.431 Y1.4 ; C6.2 v1(10.16,26.949) ; 11.38,41.408 C14.C v1(12.446,42.474) ; C19.2@17.018,41.58 v1(17.018,42.646) ; C21.2@19.177,41.567 v1(19.177,42.633) ; C18.2@21.971,39.294 v1(21.971,40.36) ; C20.2@23.394,36.093 v1(24.46,36.093) ; R7.1 24.13,34.671 v1(24.536,34.265) ; v1(25.019,25.806) 25.743,25.806 C9.2@25.883,25.946 ; C9.2 26.035,25.7 26.226,25.509 26.32,25.509 27.051,24.778 27.051,22.733 ; U5.2 32.258,31.988 C3.1 ; v1(33.131,30.188) C3.1 ; C12.1 v1(33.131,38.138) ; v1(34.058,31.115) C3.1 ; C7.2 v1(34.671,38.151)
  Top Layer w0.508: v1(11.329,33.214) C17.2 ; C17.2@12.607,33.426 C16.2 ; C10.2 17.386,28.13 v1(18.726,29.47) 20.066,30.81 v1@24.409,30.81
  Bottom Layer w0.254: 30.756,32.563 v1(33.131,30.188)
  Bottom Layer w0.305: v1(10.287,9.449) 10.32,9.482 14.115,9.482 14.471,9.125 17.418,9.125 v1(19.164,7.379) ; v1@18.593,35.408 19.202,35.408 21.031,37.236 v1(21.031,39.319)
  Bottom Layer w0.381: TF1.6 v1(15.165,20.524) ; v1(25.019,33.223) 25.679,32.563 30.756,32.563 30.758,32.563 v1@33.131,30.19
  other v1: 14.097,4.775 15.138,4.775 16.18,4.775 9.931,4.801 10.922,4.801 28.727,5.639 9.931,5.664 10.922,5.664 28.727,6.299 10.922,6.528 26.568,7.03 4.674,8.509 7.48,9.449 9.182,9.449 27.737,10.693 15.443,10.947 16.434,10.947 17.323,10.947 19.304,13.843 20.574,13.843 20.574,13.843 21.844,13.843 12.014,13.995 5.08,14.808 12.294,16.434 15.9,17.755 17.247,17.755 18.313,17.755 31.75,18.009 31.725,19.533 28.677,19.837 28.245,20.422 28.854,20.422 2.032,21.438 33.68,21.565 1.118,21.971 33.858,24.663 33.274,26.619 6.604,27.813 29.312,27.889 32.512,27.889 17.348,28.397 31.267,28.55 33.909,29.261 30.277,29.896 20.066,30.785 24.435,30.81 1.524,32.893 1.321,33.96 18.542,35.408 1.321,35.623 1.321,37.287 24.841,37.617 2.794,37.973 25.502,38.227 26.187,40.437 21.565,42.443
GPIO1: U1.84
GPIO2: U1.85
GPIO3: U1.82
I2C1_SCL: R4.2 U1.95 U2.A5 | length 16.3
  Top Layer w0.152: U1.95 14.28,27.793 v1(17.577,31.09) ; U2.A5 20.159,34.085 20.159,32.8 v1(20.93,32.029) 21.057,31.902 R4.2
  Bottom Layer w0.152: v1(17.577,31.09) 18.517,32.029 v1(20.93,32.029)
I2C1_SDA: R6.2 U1.96 U2.B5 | length 17.6
  Top Layer w0.152: U1.96 13.78,28.106 v1(17.577,31.902) ; U2.B5 19.28,35.014 20.037,35.014 20.625,34.426 20.625,33.604 v1(20.93,33.299) ; v1@21.124,33.274 R6.2
  Bottom Layer w0.152: v1(17.577,31.902) 18.313,32.639 20.269,32.639 v1(20.93,33.299)
I2C2_SCL: JP1.5 U1.46 | length 22.6
  Top Layer w0.152: v1(21.495,10.215) 21.78,9.929 U1.46
  Bottom Layer w0.152: JP1.5 3.696,11.189 14.097,11.189 15.071,10.215 v1(21.495,10.215)
I2C2_SDA: JP1.6 U1.47 | length 25.3
  Top Layer w0.152: U1.47 v1(22.28,10.215)
  Bottom Layer w0.152: JP1.6 2.921,7.874 2.921,9.246 4.47,10.795 13.741,10.795 14.884,9.652 21.717,9.652 v1(22.28,10.215)
LED_B: RN1.6 U1.17 | length 19.4
  Top Layer w0.152: RN1.6 9.493,29.699 v1(9.5,29.693) ; v1(8.814,14.021) 9.176,14.383 U1.17
  Bottom Layer w0.152: v1(8.814,14.021) 9.474,14.681 9.474,29.667 v1(9.5,29.693)
LED_G: RN1.7 U1.16 | length 19.1
  Top Layer w0.152: RN1.7 8.592,30.499 v1(8.636,30.455) ; v1(8.128,14.732) 8.89,14.732 9.041,14.883 U1.16
  Bottom Layer w0.152: v1(8.128,14.732) 8.128,29.947 v1(8.636,30.455)
LED_IR: RN1.5 U1.1 | length 9.1
  Top Layer w0.152: v1(7.544,28.092) 7.568,28.116 RN1.5 ; v1@7.645,22.403 7.665,22.383 U1.1
  Bottom Layer w0.152: v1(7.544,28.092) 7.595,28.042 v1(7.595,22.403)
LED_R: RN1.8 U1.15 | length 19
  Top Layer w0.152: RN1.8 7.583,31.284 8.671,31.284 v1(9.5,30.455) ; v1(8.83,15.383) U1.15
  Bottom Layer w0.152: v1(8.83,15.383) 8.83,29.785 v1(9.5,30.455)
NetC4_1: C4.1 C5.1 L1.1 U1.20 U1.21 | length 8.7
  Top Layer w0.254: L1.1 C5.1 C4.1 8.255,12.065 ; U1.21 8.852,12.383 8.534,12.065 8.255,12.065 ; U1.20 8.743,12.883 8.255,12.395 8.255,12.065
NetC7_1: C7.1 U5.4 | length 1.6
  Top Layer w0.152: U5.4 U5.4@33.419,35.674
  Top Layer w0.508: U5.4@33.419,35.674 C7.1
NetC19_1: C19.1 U2.E3 | length 5.8
  Top Layer w0.152: U2.E3 16.63,36.263 17.4,37.033 v1(17.374,37.033) ; C19.1 v1(18.13,40.005)
  Bottom Layer w0.152: v1(17.374,37.033) 18.44,38.1 18.44,39.695 v1(18.13,40.005)
NetC20_1: C20.1 U2.A3 | length 2.3
  Top Layer w0.152: U2.A3 20.479,36.214 20.625,36.068 C20.1
NetC21_1: C21.1 U2.B2 | length 6.1
  Top Layer w0.152: v1(18.142,37.014) U2.B2 ; C21.1@19.177,39.967 v1(20.289,39.967)
  Bottom Layer w0.152: v1(18.142,37.014) 18.821,37.694 18.821,39.192 19.596,39.967 v1(20.289,39.967)
NetC40_2: C40.2 U1.13 Y1.3 | length 5.4
  Top Layer w0.152: C40.2 Y1.3@6.617,15.562 ; Y1.3 6.744,15.786 7.341,16.383 U1.13
NetC41_2: C41.2 U1.12 Y1.1 | length 7.2
  Top Layer w0.152: C41.2 5.067,17.966 Y1.1 5.144,17.764 6.025,16.883 U1.12
NetL2_1: L2.1 X1.1
NetLED1_1: LED1.1 RN1.1 | length 6.2
  Top Layer w0.381: LED1.1 3.62,29.324 2.642,30.302 2.642,31.344 3.124,31.826 4.47,31.826 4.998,31.299 RN1.1
NetLED1_3: LED1.3 RN1.3 | length 7.1
  Top Layer w0.381: LED1.3 1.155,30.874 2.184,29.845 2.184,29.185 2.87,28.499 4.559,28.499 4.826,28.765 4.826,29.54 4.975,29.69 RN1.3@5.758,29.69
NetLED1_4: LED1.4 RN1.2 | length 2.1
  Top Layer w0.381: LED1.4 4.026,30.874 4.401,30.499 RN1.2
NetLED2_2: LED2.2 LED3.1 | length 22.3
  Top Layer w0.381: LED3.1 25.068,43.41 28.068,40.41 LED2.2
NetLED3_2: LED3.2 R1.2 | length 19.6
  Top Layer w0.381: v1(5.817,23.292) R1.2 ; v1(7.239,39.065) LED3.2
  Bottom Layer w0.381: v1(5.817,23.292) 4.724,24.384 4.724,36.551 v1(7.239,39.065)
NetQ1_1: Q1.1 R2.2 RN1.4 | length 9.3
  Top Layer w0.381: R2.2 1.016,24.16 1.206,23.969 Q1.1 2.479,27.219 2.921,27.661 5.258,27.661 5.767,28.17 RN1.4
NetQ1_3: Q1.3 R1.1 | length 2.5
  Top Layer w0.381: Q1.3 3.429,26.141 3.739,25.832 R1.1
NetR5_2: R5.2 R10.1 U8.4 | length 3.3
  Top Layer w0.508: R5.2 R10.1 14.117,3.213 14.163,3.259 U8.4
NRST: C1.1 JP2.1 JP3.4 RN3.4 U1.14 | length 40.9
  Top Layer w0.152: U1.14 11.346,15.883 v1(11.887,15.342) ; JP3.4 32.741,14.58 v1(32.741,15.545) 32.741,18.39 JP2.1 ; RN3.4@30.156,23.971 30.156,23.311 30.48,22.987 C1.1@31.262,22.987 ; C1.1 31.356,23.965 v1(31.369,23.978)
  Bottom Layer w0.152: v1(11.887,15.342) 12.497,14.732 22.352,14.732 23.165,15.545 v1@32.715,15.545 ; v1(31.369,23.978) 31.369,22.86 33.909,20.32 JP2.1
RAW: C44.2 D3.1 Q2.2 U8.1 U8.3
SD_CD: RN2.2 TF1.9 U1.81 | length 23.1
  Top Layer w0.152: v1(15.469,21.361) 16.51,21.361 17.043,21.895 20.523,21.895 21.28,22.652 U1.81 21.28,25.446 23.952,28.118 26.772,28.118 27.54,28.886 RN2.2
  Bottom Layer w0.152: TF1.9 11.865,20.323 12.192,20.65 13.818,20.65 14.529,21.361 v1(15.469,21.361)
SDIO_CLK: TF1.5 U1.80 | length 9
  Top Layer w0.152: v1(16.256,20.524) 17.195,21.463 20.549,21.463 21.78,22.694 U1.80
  Bottom Layer w0.152: v1@16.256,20.549 v1(16.256,20.524) 16.256,19.267 TF1.5
SDIO_CMD: RN2.1 TF1.3 U1.83 | length 15.9
  Top Layer w0.152: v1(20.269,22.428) 20.28,22.439 U1.83 20.28,25.208 23.597,28.524 26.34,28.524 26.74,28.924 RN2.1
  Bottom Layer w0.152: TF1.3 18.465,20.624 v1(20.269,22.428)
SDIO_D0: RN2.3 TF1.7 U1.65 | length 29
  Top Layer w0.152: v1@21.123,17.383 U1.65 26.508,17.383 v1(26.899,16.993) ; RN2.3 v1(28.34,28.708) v1@28.346,28.702
  Bottom Layer w0.152: TF1.7 14.065,18.015 15.054,17.026 20.672,17.026 21.057,17.411 v1(21.057,17.45) ; v1(26.899,16.993) 27.616,17.71 27.616,21.279 27,21.895 27,27.369 v1(28.34,28.708)
SDIO_D1: RN2.4 TF1.8 U1.66 | length 31.4
  Top Layer w0.152: v1(19.329,16.485) 20.879,18.034 22.531,18.034 22.682,17.883 U1.66 26.719,17.883 v1(26.721,17.882) ; RN2.4 29.14,28.721 v1(29.159,28.702)
  Bottom Layer w0.152: TF1.8 12.965,18.175 14.656,16.485 v1(19.329,16.485) ; v1(26.721,17.882) 27.254,18.415 27.254,21.006 26.568,21.692 26.568,27.711 28.118,29.261 28.6,29.261 v1(29.159,28.702)
SDIO_D2: RN3.8 TF1.1 U1.78 | length 14.3
  Top Layer w0.152: v1(21.59,20.803) 22.78,21.993 U1.78 22.78,25.472 24.649,27.341 27.243,27.341 27.756,26.829 RN3.8
  Bottom Layer w0.152: TF1.1 20.665,20.386 21.082,20.803 v1(21.59,20.803)
SDIO_D3: RN3.7 TF1.2 U1.79 | length 16.5
  Top Layer w0.152: v1(21.615,21.768) 22.28,22.432 U1.79 22.28,25.658 24.384,27.762 27.686,27.762 28.556,26.892 RN3.7
  Bottom Layer w0.152: TF1.2 19.565,20.581 20.752,21.768 v1(21.615,21.768)
SPI2_MISO: JP1.2 U1.53 | length 26.6
  Top Layer w0.152: 19.884,11.635 23.598,11.635 23.851,11.383 U1.53
  Bottom Layer w0.152: JP1.2 3.099,15.316 3.099,13.741 4.14,12.7 18.627,12.7 v1(19.617,11.709)
SPI2_MOSI: JP1.1 U1.54 | length 28.7
  Top Layer w0.152: v1(20.523,12.522) 20.93,12.116 23.647,12.116 23.88,11.883 U1.54
  Bottom Layer w0.152: JP1.1 3.099,17.856 3.099,16.434 3.658,15.875 3.658,14.021 4.496,13.183 18.948,13.183 19.609,12.522 v1(20.523,12.522)
SPI2_NSS: JP1.4 U1.51 | length 24.3
  Top Layer w0.152: v1(17.755,11.709) 18.644,10.82 23.317,10.82 23.755,10.383 U1.51
  Bottom Layer w0.152: JP1.4 17.729,11.684 v1(17.755,11.709)
SPI2_SCLK: JP1.3 U1.52 | length 25.1
  Top Layer w0.152: v1(18.686,11.709) 19.219,11.176 23.52,11.176 23.813,10.883 U1.52
  Bottom Layer w0.152: JP1.3 3.632,12.243 18.153,12.243 v1(18.686,11.709)
SPI3_MISO: U1.90
SPI3_MOSI: U1.91
SPI3_SCLK/TRACESWO: JP3.1 U1.89 | length 28.3
  Top Layer w0.152: v1(15.138,15.342) 14.529,15.951 14.529,21.184 15.265,21.92 16.561,21.92 17.28,22.639 U1.89
  Bottom Layer w0.152: v1(15.138,15.342) 15.68,15.884 22.208,15.884 22.682,16.358 28.194,16.358 29.058,17.221 29.058,18.517 JP3.1
SPI3_SSEL: U1.77
SW: L3.1 U8.5
SWCLK: JP3.2 U1.76 | length 25.3
  Top Layer w0.152: v1(17.247,15.342) 20.409,18.504 21.145,18.504 23.78,21.138 U1.76
  Bottom Layer w0.152: v1(17.247,15.342) 22.428,15.342 23.012,15.926 29.007,15.926 JP3.2
SWDIO: JP3.3 U1.72 | length 9.2
  Top Layer w0.152: U1.72 26.793,20.883 28.829,18.847 28.829,15.748 JP3.3
TIM4_CH1: JP2.6 U1.59 | length 15.3
  Top Layer w0.152: v1@23.952,14.351 23.915,14.351 23.883,14.383 U1.59
  Bottom Layer w0.152: v1@23.952,14.351 26.06,14.351 29.896,10.516 31.42,10.516 32.283,9.652 32.283,8.484 JP2.6
  other v1: 23.927,14.402
TIM4_CH2: JP2.5 U1.60 | length 11.6
  Top Layer w0.152: U1.60 25.388,14.875 26.349,14.875 v1(26.848,14.376)
  Bottom Layer w0.152: v1(26.848,14.376) 28.143,13.081 31.547,13.081 32.41,12.217 32.41,10.897 JP2.5
TIM4_CH3: JP2.4 U1.61 | length 15.3
  Top Layer w0.152: v1(22.936,14.376) 23.943,15.383 U1.61
  Bottom Layer w0.152: v1(22.936,14.376) 23.546,14.986 27.178,14.986 28.727,13.437 32.41,13.437 JP2.4
UART2_RX: U1.87
UART2_TX: U1.86
VBUS: L2.2 Q2.3 U1.68 | length 17.2
  Top Layer w0.254: U1.68 v1(26.71,18.883)
  Top Layer w0.381: v1(26.71,18.883) 27.091,18.883 27.61,18.364 27.61,12.344 v1(26.899,11.633)
  Bottom Layer w0.381: v1(22.377,5.74) 26.899,10.262 v1(26.899,11.633)
VCAP1: C49.1 U1.48 | length 4.1
  Top Layer w0.254: C49.1 20.714,7.15 20.879,7.315 22.555,7.315 22.78,7.54 U1.48
VCAP2: C48.1 U1.73 | length 3.1
  Top Layer w0.152: C48.1@28.355,21.383 C48.1
  Top Layer w0.254: U1.73 C48.1@28.355,21.383
VCC: C2.2 C3.2 C6.1 C8.1 C9.1 C10.1 C11.A C13.1 C14.A C16.1 C17.1 JP1.8 JP3.5 L1.2 L3.2 LED1.2 LED2.1 R4.1 R6.1 R10.2 RN2.5 RN2.6 RN2.7 RN2.8 RN3.1 RN3.2 RN3.5 TF1.4 U1.6 U1.11 U1.27 U1.50 U1.75 U1.100 U2.E5 U5.1 U5.3 | length 218.9
  Top Layer w0.254: C13.1@8.115,19.748 8.25,19.883 U1.6 ; 8.357,17.628 8.601,17.383 U1.11 ; v1(9.779,8.387) 10.673,7.493 11.989,7.493 12.28,7.784 U1.27 ; C9.1 C9.1@26.16,24.119 ; RN3.1 27.766,24.109 v1@27.766,23.364 ; v1@27.915,23.216 28.407,23.216 28.556,23.364 RN3.2 ; RN3.5 v1(30.156,26.791)
  Top Layer w0.381: 3.658,9.55 3.746,9.639 L1.2 ; v1@3.658,21.031 6.833,21.031 C13.1@8.115,19.748 ; C13.1 8.077,17.907 8.357,17.628 ; U2.E5@16.624,34.62 U2.E5 16.998,34.614 17.006,34.621 17.095,34.621 v1(17.12,34.646) ; R6.1 R4.1 23.458,31.888 v1(25.476,31.888) RN2.8 26.74,32.684 27,32.944 27.661,32.944 ; RN2.7 27.54,32.823 27.661,32.944 ; RN2.6 28.34,32.836 28.448,32.944 ; RN2.5 29.14,32.785 28.981,32.944 28.448,32.944 ; 27.661,32.944 28.448,32.944
  Top Layer w0.508: v1(1.013,28.191) LED1.2 ; 5.283,22.454 6.426,22.454 7.846,23.873 C11.A 8.372,24.244 C6.1 11.633,24.244 ; v1(10.287,41.681) 10.287,40.767 11.9,39.154 11.9,39.054 C14.A@12.346,38.608 ; C14.A C14.A@12.346,38.608 ; v1(15.215,34.976) C16.1 12.471,34.976 11.405,36.043 11.405,37.668 12.344,38.608 C14.A@12.346,38.608 ; v1(18.936,25.565) C10.1 ; C10.1@19.157,26.891 19.66,27.394 21.476,27.394 23.355,29.273 24.905,29.273 25.476,29.845 v1(25.476,31.888) ; U1.50@23.901,8.522 C8.1 25.539,8.534 v1(26.568,8.534) ; v1(26.824,43.41) LED2.1 ; C3.2 C3.2@31.308,31.292 ; U5.1 31.308,33.823 31.623,34.138 32.944,34.138 33.208,33.873 U5.3
  Top Layer w0.559: C3.2@31.308,31.292 U5.1
  Top Layer w0.635: v1(30.099,31.115) C3.2
  Top Layer w0.762: JP1.8 3.658,3.531 3.658,9.55 3.658,21.031 3.658,21.819 4.293,22.454 5.283,22.454
  Bottom Layer w0.381: 25.959,29.642 26.086,29.769 29.108,29.769 30.156,28.721 v1(30.156,26.791) 30.156,25.533 v1(27.838,23.216)
  Bottom Layer w0.508: v1(15.215,34.976) 15.545,34.646 v1(17.12,34.646) ; TF1.4 17.365,21.048 18.936,22.619 v1(18.936,25.565) ; 25.933,31.902 25.959,31.877 25.959,29.642 v1(25.959,24.46)
  Bottom Layer w0.635: v1(1.013,28.191) 3.708,28.191 ; v1(3.708,21.234) 3.708,28.191 ; v1(26.824,43.41) 25.07,41.656 23.52,41.656 ; v1(30.099,31.115) 29.312,31.902 25.933,31.902 24.51,31.902 23.52,32.892 23.52,41.656 ; 3.708,28.191 3.708,37.109 8.255,41.656 23.52,41.656
  Bottom Layer w0.762: 4.674,1.753 4.445,1.981 4.445,6.782 6.02,8.357 15.545,8.357 19.507,4.394 22.504,4.394 27.508,9.398 JP3.5
  other v1: 9.322,1.041 9.931,1.041 9.322,1.829 9.931,1.829
VDDA: C12.2 R3.2 U5.5 | length 11
  Top Layer w0.508: R3.2 26.492,39.319 27.026,38.786 30.556,38.786 31.131,38.211 C12.2 31.308,37.034 U5.5
VIN: D3.2 JP2.7 Q2.1 R9.2 X4.1 | length 31.9
  Bottom Layer w1.016: X4.1 5.985,4.81 7.417,3.378 13.096,3.378 14.808,1.666 21.554,1.666 22.936,3.048 32.639,3.048 JP2.7
  other v1: 18.974,1.626 19.685,1.626
pads on no net: LM1.1 LM1.2 U1.2 U1.7 U1.8 U1.9 U1.18 U1.22 U1.23 U1.24 U1.25 U1.31 U1.32 U1.33 U1.34 U1.35 U1.36 U1.37 U1.38 U1.39 U1.40 U1.41 U1.42 U1.43 U1.44 U1.45 U1.57 U1.58 U1.62 U2.A6 U2.E2 X1.0@23.283,1.417 X1.0@23.678,1.417 X1.0@26.028,1.417 X1.0@28.328,1.417 X1.0@30.678,1.417 X1.0@31.073,1.417 X1.4
copper on no net:
  other v2: 13.465,29.758 21.465,29.758

## Polygon pours and split planes (outlines as drawn)
GND on Top Layer "GND_L01_P006" (solid, remove dead copper, pour order 6): 0,44.45 35.56,44.45 35.56,0 0,0
GND on Bottom Layer "GND_L02_P004" (solid, remove dead copper, pour order 4): 0,44.45 35.56,44.45 35.56,0 0,0

## Keep-outs
Keep-Out Layer:
  the board outline again, w0.2

## Other copper
Top Layer:
  rectangle net GND: 16.942,26.416 17.805,27.381
  pour cut-out: 14.402,4.521 15.316,4.521 15.57,4.267 15.57,0.254 14.376,0.254 14.402,0.279
  pour cut-out: 30.67,11.938 31.242,11.367 31.242,8.826 30.67,8.255 29.527,8.255 29.527,7.531 28.778,6.782 27.94,6.782 27.864,6.858 27.864,11.938
  pour cut-out: 18.085,28.118 18.085,25.933 17.881,25.73 17.881,25.477 18.212,25.146 19.38,25.146 19.71,25.476 19.71,27.838 19.431,28.118
  pour cut-out: 5.41,25.171 11.532,25.171 11.786,24.917 11.786,23.368 11.481,23.063 5.486,23.063 5.41,22.987
  pour cut-out: 5.969,21.336 5.969,18.974 5.69,18.694 4.597,18.694 4.14,19.152 4.14,21.209 4.216,21.285
  pour cut-out: 31.242,20.13 31.242,15.05 32.194,15.05 32.385,14.859 32.385,12.89 32.404,12.871 29.699,12.871 29.058,13.513 29.058,19.253 29.947,20.142
  pour cut-out: 15.147,38.577 20.296,38.577 20.405,38.468 20.405,33.207 20.295,33.096 15.138,33.096
  pour cut-out: 18.059,7.849 20.244,7.849 20.447,7.645 20.447,6.248 20.015,5.817 18.39,5.817 18.034,6.172
  pour cut-out: 31.394,13.233 32.042,13.233 32.766,12.509 32.766,3.912 33.579,3.099 35.23,3.099 35.23,14.275 34.468,15.037 31.928,15.037 31.369,14.478
  pour cut-out: 3.937,12.065 8.079,12.065 8.955,11.189 8.955,10.389 8.899,10.333 3.983,10.333 3.937,10.287
  pour cut-out: 32.537,38.557 32.537,34.742 32.258,34.463 32.085,34.463 31.496,35.052 31.496,38.481 31.42,38.557
  region net GND: 28.27,3.099 28.27,6.274 29.667,7.671 31.039,7.671 31.369,7.341 31.369,6.121 30.632,5.385 28.956,5.385 28.677,5.105 28.677,3.073
  region net GND: 13.233,5.436 13.233,4.828 13.566,4.496 16.383,4.496 16.866,4.013 16.866,2.261 17.043,2.083 18.059,2.083 18.237,2.261 18.237,4.928 18.212,4.953 15.799,4.953 15.469,5.283 15.469,6.756 15.418,6.807 14.91,6.807 14.808,6.706 14.808,5.41 14.524,5.126 13.848,5.126 13.589,5.385 13.589,6.68 13.386,6.883 9.982,6.883 9.169,6.071 9.169,3.226 9.474,2.921 11.659,2.921 11.735,2.997 11.735,5.359 11.938,5.563 13.106,5.563
  region net VCC: 24.689,22.352 24.689,24.308 25.171,24.79 26.441,24.79 26.467,24.765 26.467,22.53 26.238,22.301
  region net VCC: 14.376,2.261 9.093,2.261 8.788,1.956 8.788,0.559 9.093,0.254 14.376,0.254
  region net SW: 15.57,4.267 16.332,4.267 16.637,3.962 16.637,0.254 15.57,0.254
  region net RAW: 13.818,5.41 13.818,7.391 14.046,7.62 17.932,7.62 18.263,7.29 18.263,6.223 18.923,5.563 19.329,5.156 19.329,4.064 19.456,3.937 21.539,3.937 21.996,3.48 21.996,0.584 22.022,0.559 20.93,0.559 20.777,0.711 20.803,0.737 20.803,1.626 20.498,1.93 20.498,3.226 20.193,3.531 18.618,3.531 18.39,3.759 18.39,5.08 18.212,5.258 15.9,5.258 15.773,5.385 15.773,6.858 15.545,7.087 14.732,7.087 14.529,6.883 14.529,5.461 14.478,5.41
  region net GND: 25.121,7.468 26.568,7.468 26.822,7.214 26.822,6.68 26.645,6.502 25.121,6.502
  region net VBUS: 19.533,5.563 21.387,5.563 21.844,6.02 21.844,6.909 21.895,6.96 22.885,6.96 22.911,6.934 22.911,4.826 22.2,4.115 19.533,4.115
  region net NetL2_1: 23.419,6.934 24.765,6.934 24.892,6.807 24.892,6.401 25.071,6.222 25.777,6.222 26.137,5.862 26.137,3.175 26.06,3.099 25.705,3.099 25.603,3.2 25.603,4.902 25.298,5.207 23.622,5.207 23.419,5.41
  region net VIN: 17.094,1.524 18.186,1.524 18.567,1.905 18.567,3.378 20.091,3.378 20.091,0.787 19.863,0.559 18.513,0.559 18.212,0.258 17.217,0.258 17.094,0.381
Bottom Layer:
  rectangle net VCC: 0.61,0.533 10.439,2.362
  pour cut-out: 27.584,19.126 31.102,19.126 31.242,18.986 31.242,12.09 30.81,11.659 28.931,11.659 27.534,13.056
  pour cut-out: 34.874,20.549 33.185,20.549 32.766,20.13 32.766,2.896 33.503,2.159 34.925,2.159 35.509,2.743 35.509,19.888 34.874,20.523

## Silkscreen, mask and mechanical layers (free items; w line width, h text height)
Top Overlay:
  lines w0.2: 5.105,43.688 5.867,43.688 ; 5.486,43.307 5.486,44.069 ; 17.932,32.588 17.932,29.362 20.777,29.362 20.777,32.588 21.124,32.588 ; 29.693,43.688 30.455,43.688 ; 30.074,43.307 30.074,44.069
  text "P0" at 3.835,19.152 h0.69 r90
  text "RST" at 32.385,18.923 h0.69 r90
  text "SWO" at 28.448,18.542 h0.69 r90
  text "P1" at 3.81,16.256 h0.69 r90
  text "SWC" at 28.448,16.002 h0.69 r90
  text "BOOT" at 32.385,15.303 h0.65 r90
  text "P2" at 3.81,13.716 h0.69 r90
  text "SWD" at 28.448,13.462 h0.69 r90
  text "SYN" at 32.385,12.954 h0.69 r90
  text "P3" at 3.81,11.049 h0.69 r90
  text "RST" at 28.448,11.049 h0.69 r90
  text "P9" at 32.385,11.049 h0.69 r90
  text "P4" at 3.81,8.509 h0.69 r90
  text "P8" at 32.385,8.509 h0.69 r90
  text "3.3v" at 28.448,8.255 h0.69 r90
  text "P7" at 32.385,6.35 h0.69 r90
  text "P5" at 3.81,5.969 h0.69 r90
  text "GND" at 28.448,5.842 h0.69 r90
  text "P6" at 3.81,3.556 h0.69 r90
  text "VIN" at 32.385,3.429 h0.69 r90
  text "GND" at 32.385,0.889 h0.69 r90
  text "3.3V" at 3.81,0.508 h0.69 r90
Bottom Overlay:
  lines w0.254: 3.048,26.797 8.128,26.797 8.128,28.067 ; 3.048,33.147 8.128,33.147 8.128,31.877 ; 12.344,3.912 21.996,3.912 ; 12.344,15.85 19.456,15.85 ; 20.726,15.85 21.996,15.85
  text "LED1=Red" at 7.493,31.623 h0.69
  text "LED2=Green" at 7.366,30.226 h0.69
  text "LED3=Blue" at 7.366,28.956 h0.69
  text "LED4=IR" at 7.366,27.559 h0.69
  text "P0" at 3.175,18.796 h0.69 r270
  text "RST" at 31.623,18.415 h0.69 r270
  text "SWO" at 27.559,18.288 h0.69 r270
  text "Pin List" at 21.996,16.358 h0.69
  text "P1" at 3.175,16.256 h0.69 r270
  text "SWC" at 27.559,15.748 h0.69 r270
  text "BOOT" at 31.623,15.43 h0.65 r270
  text "P0=PB15/MOSI" at 21.996,14.58 h0.69
  text "P2" at 3.175,13.716 h0.69 r270
  text "P1=PB14/MISO" at 21.996,13.437 h0.69
  text "SWD" at 27.432,13.208 h0.69 r270
  text "SYN" at 31.623,12.954 h0.69 r270
  text "P2=PB13/SCLK" at 21.996,12.294 h0.69
  text "P3=PB12/SS" at 21.996,11.151 h0.69
  text "P3" at 3.175,11.049 h0.69 r270
  text "P9" at 31.623,11.049 h0.69 r270
  text "RST" at 27.432,10.795 h0.69 r270
  text "P4=PB10/TXD/SCL" at 21.996,10.008 h0.69
  text "P5=PB11/RXD/SDA" at 21.996,8.865 h0.69
  text "P4" at 3.175,8.509 h0.69 r270
  text "P8" at 31.623,8.509 h0.69 r270
  text "3.3v" at 27.432,8.001 h0.69 r270
  text "P6=PA5/ADC/DAC" at 21.996,7.722 h0.69
  text "P7=PD12/SERVO1" at 21.996,6.579 h0.69
  text "P7" at 31.623,6.096 h0.69 r270
  text "P5" at 3.175,5.969 h0.69 r270
  text "GND" at 27.432,5.588 h0.69 r270
  text "P8=PD13/SERVO2" at 21.996,5.436 h0.69
  text "P9=PD14/SERVO3" at 21.996,4.293 h0.69
  text "P6" at 3.175,3.556 h0.69 r270
  text "VIN" at 31.623,3.175 h0.69 r270
  text "Max voltage: 5v" at 21.996,1.928 h0.69
  text "GND" at 31.623,0.635 h0.69 r270
  text "3.3V" at 3.175,0.508 h0.69 r270

## Dimensions
35.56,44.45 to 35.56,0 on Mechanical 13
0,44.45 to 35.56,44.45 on Mechanical 13
2.54,36.195 to 33.02,36.195 on Mechanical 13
3.048,41.402 to 32.512,41.402 on Mechanical 13

## Text inside footprints (layer, text, board x,y; h text height)
X1: Top Overlay "PCB Edge" at 22.098,-2.012 h0.89
X4: Top Overlay "+" at 6.731,9.271 h2.2 r180; Top Overlay "-" at 8.763,9.271 h2.2 r180